# Altium PCB HRT_23D_EBS_Non1.1.PcbDoc
Units mil, origin at the board's own origin, x right, y up, seen from the top; angles counter-clockwise.
Board outline 1417.32 x 1338.58 mil, 2 copper layers (Top Layer, Bottom Layer); 17 components, 22 nets, 94 pads, 107 vias.
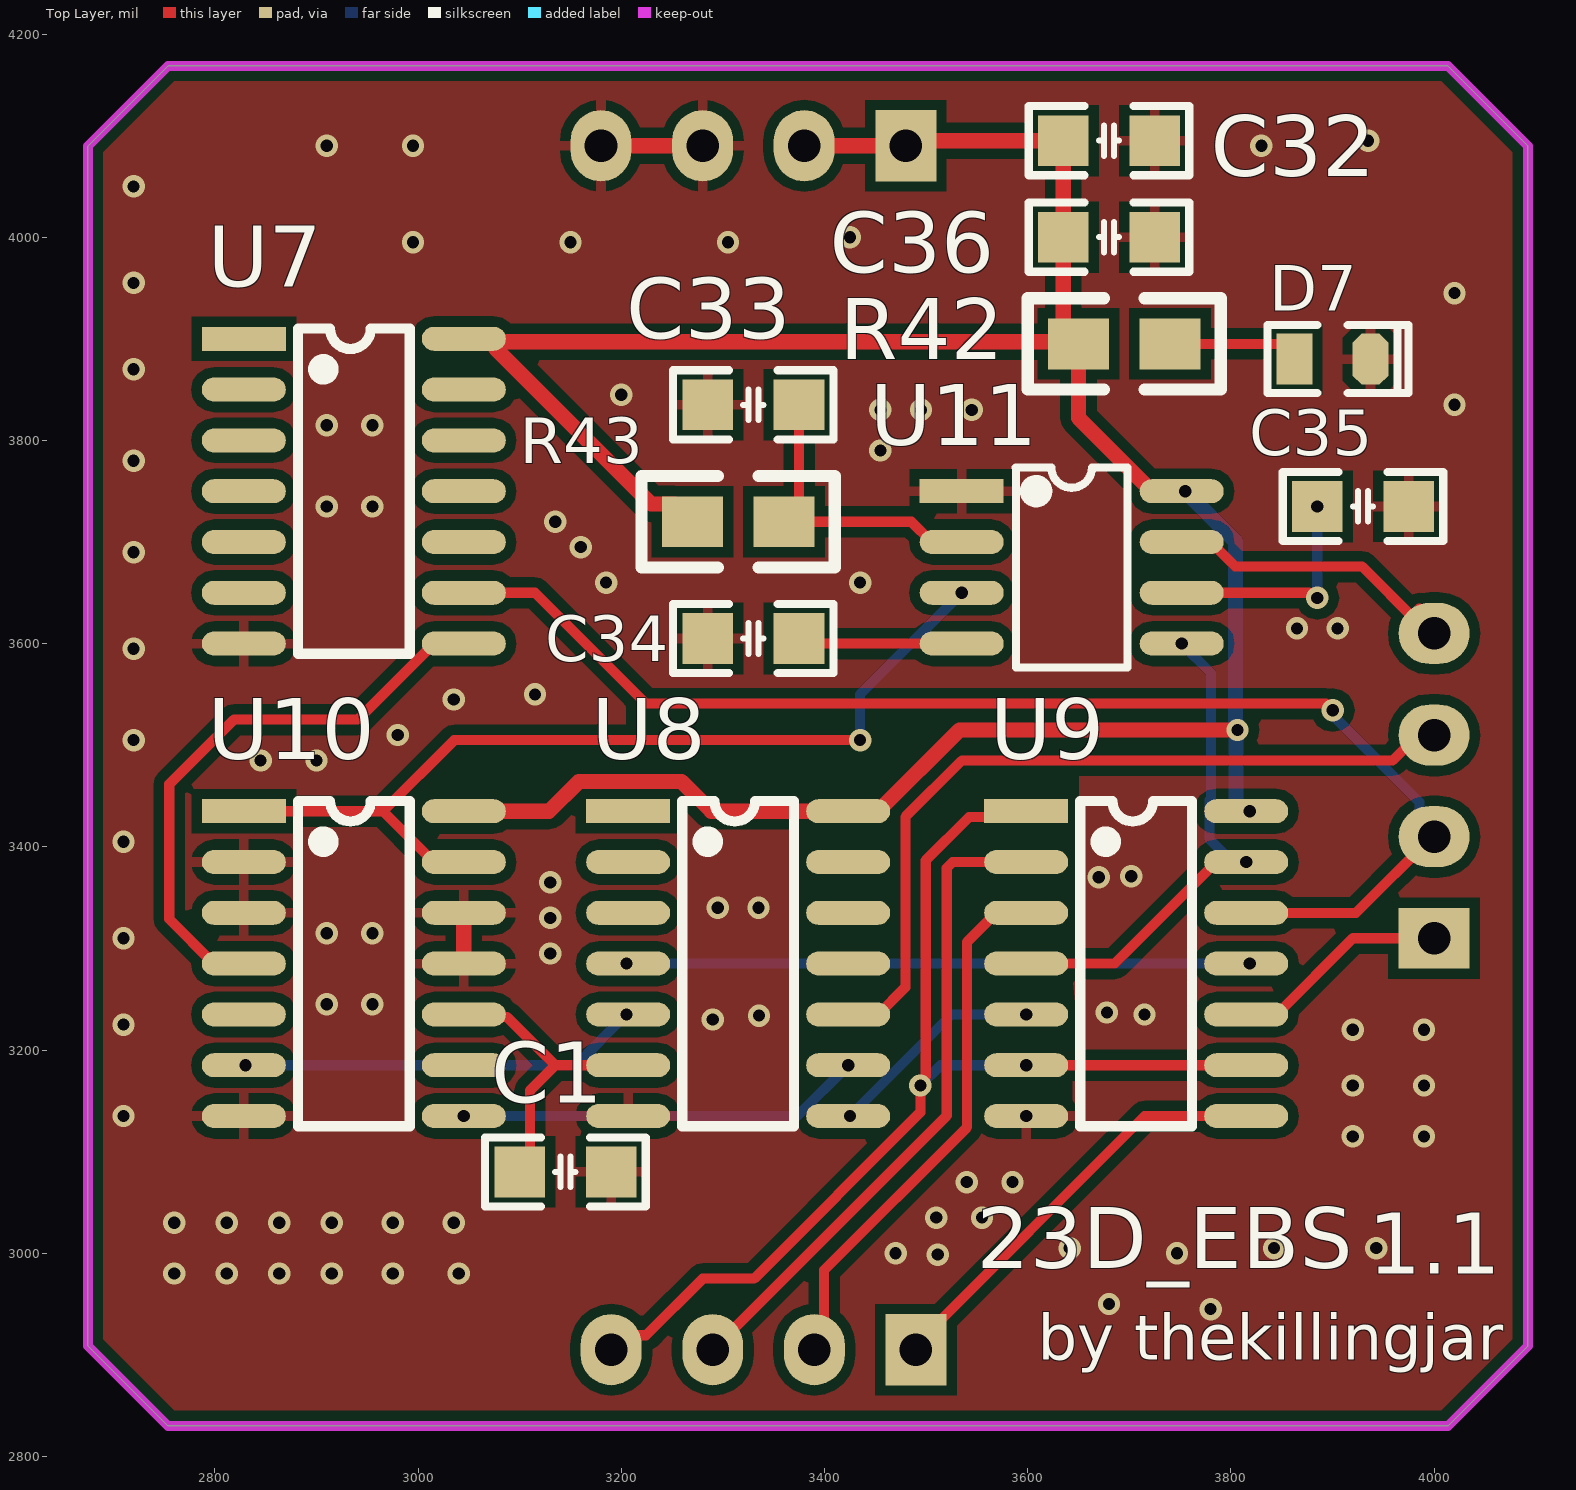
[diagram p0: Top Layer view]
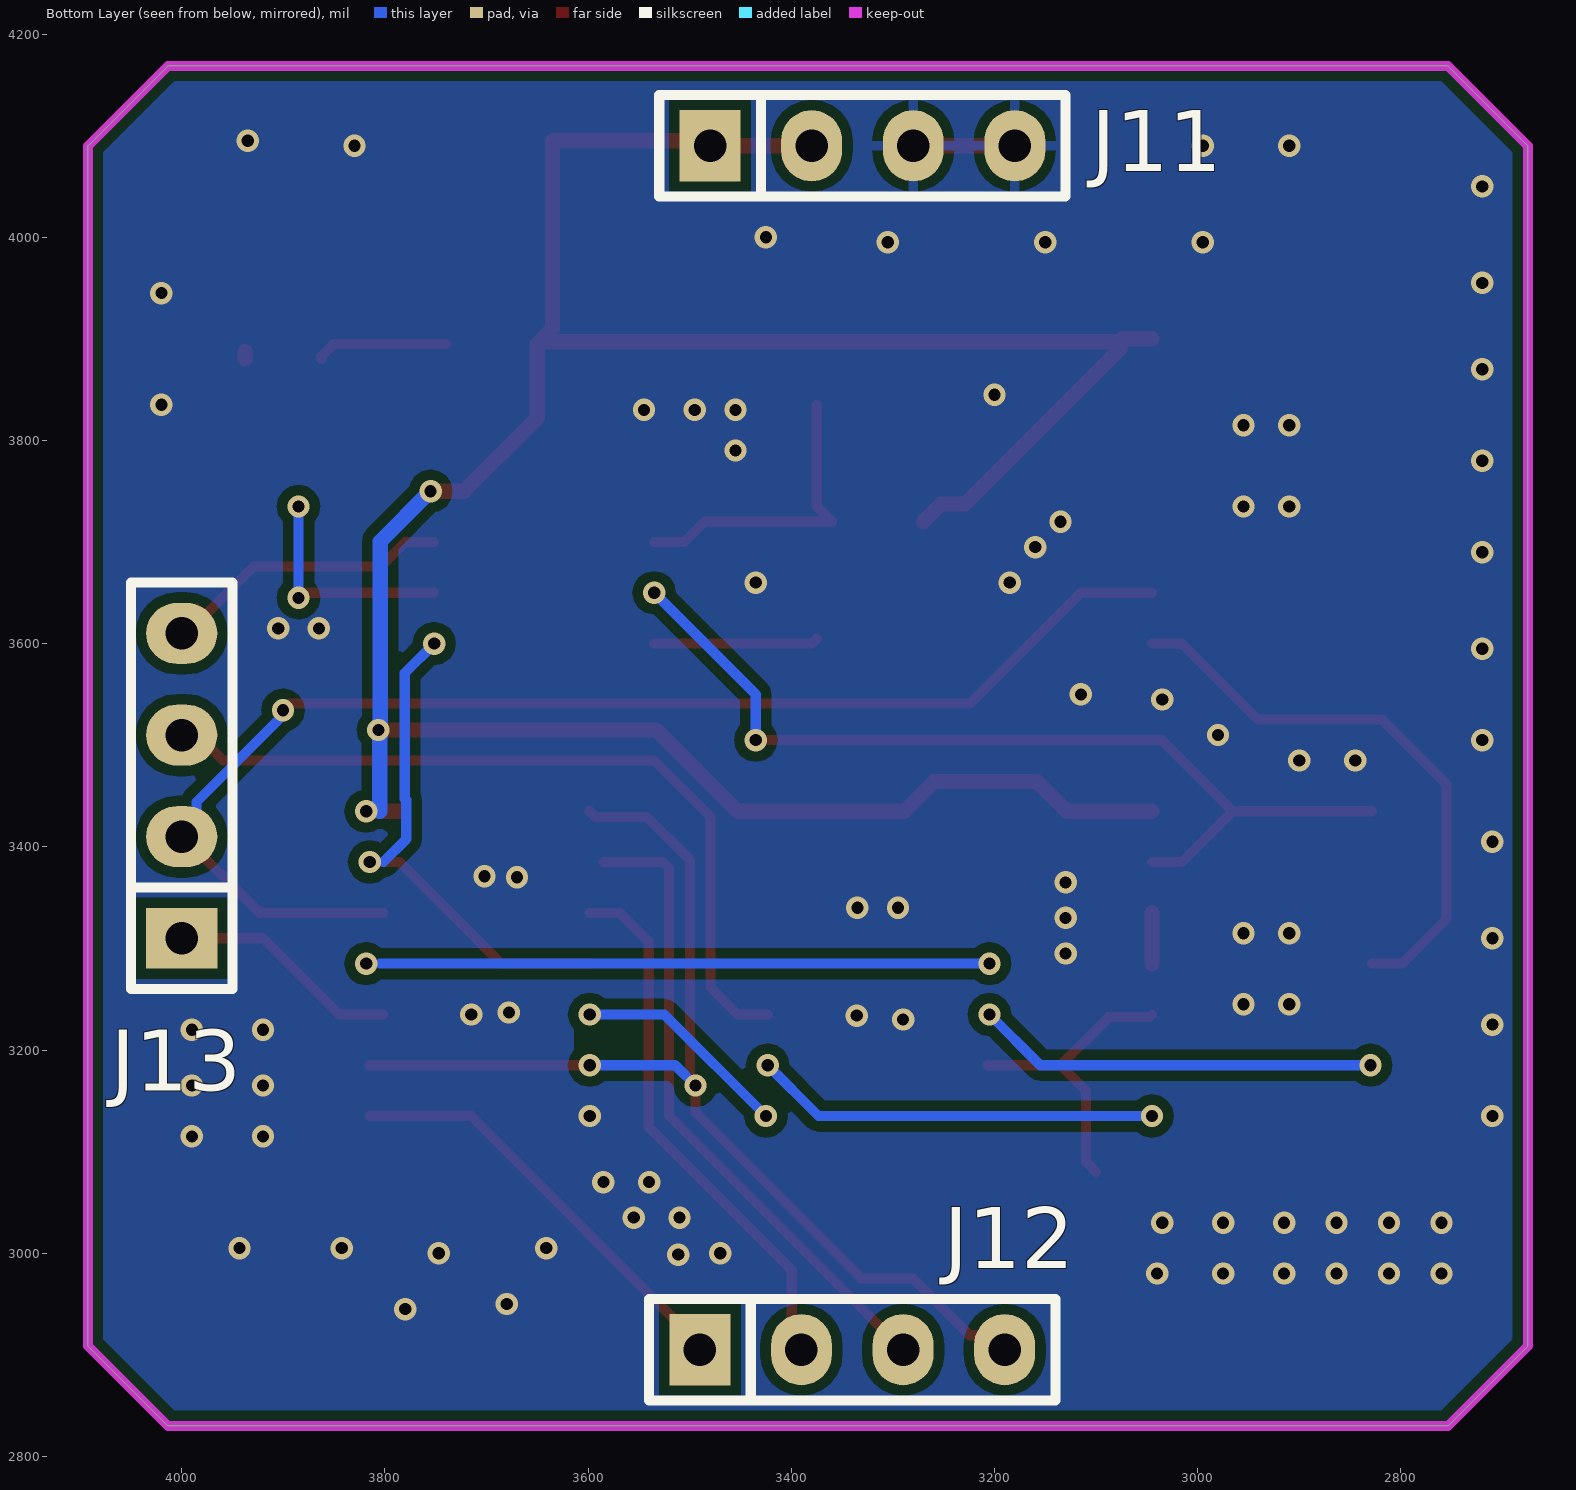
[diagram p1: Bottom Layer view, seen from below]
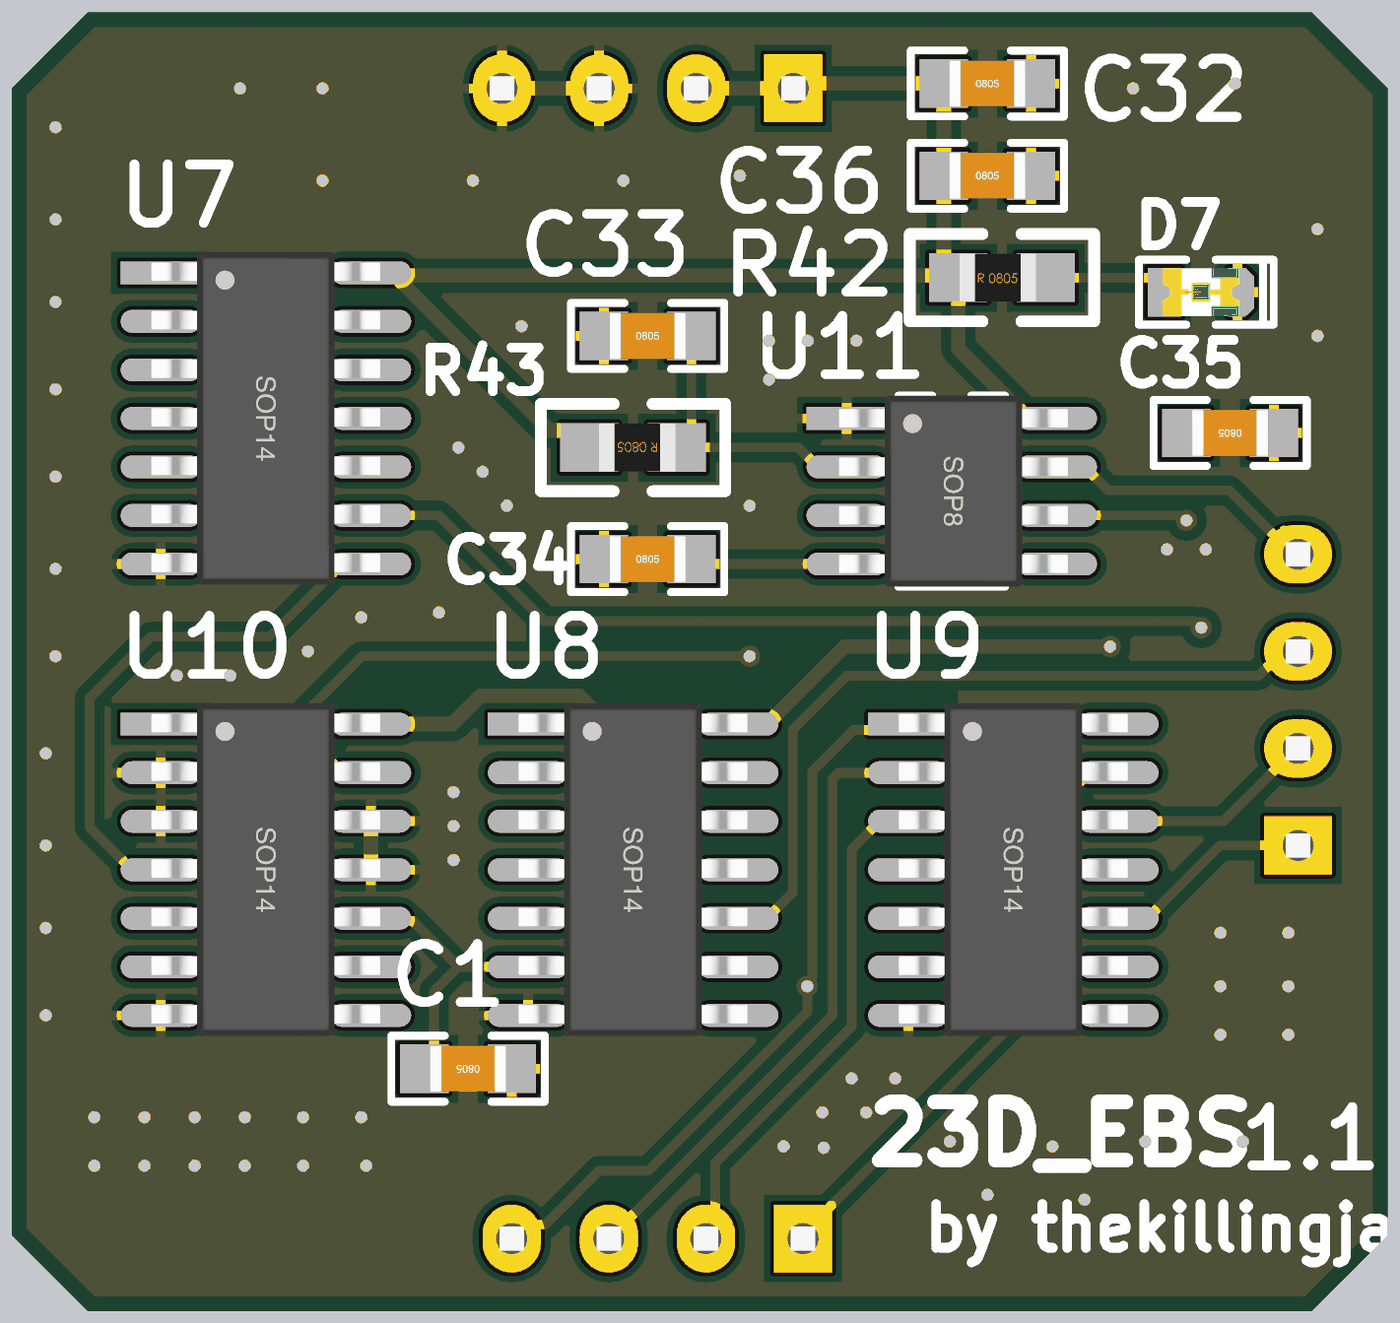
[diagram p2: 3D render of the assembled board from above, using the file's embedded part models]
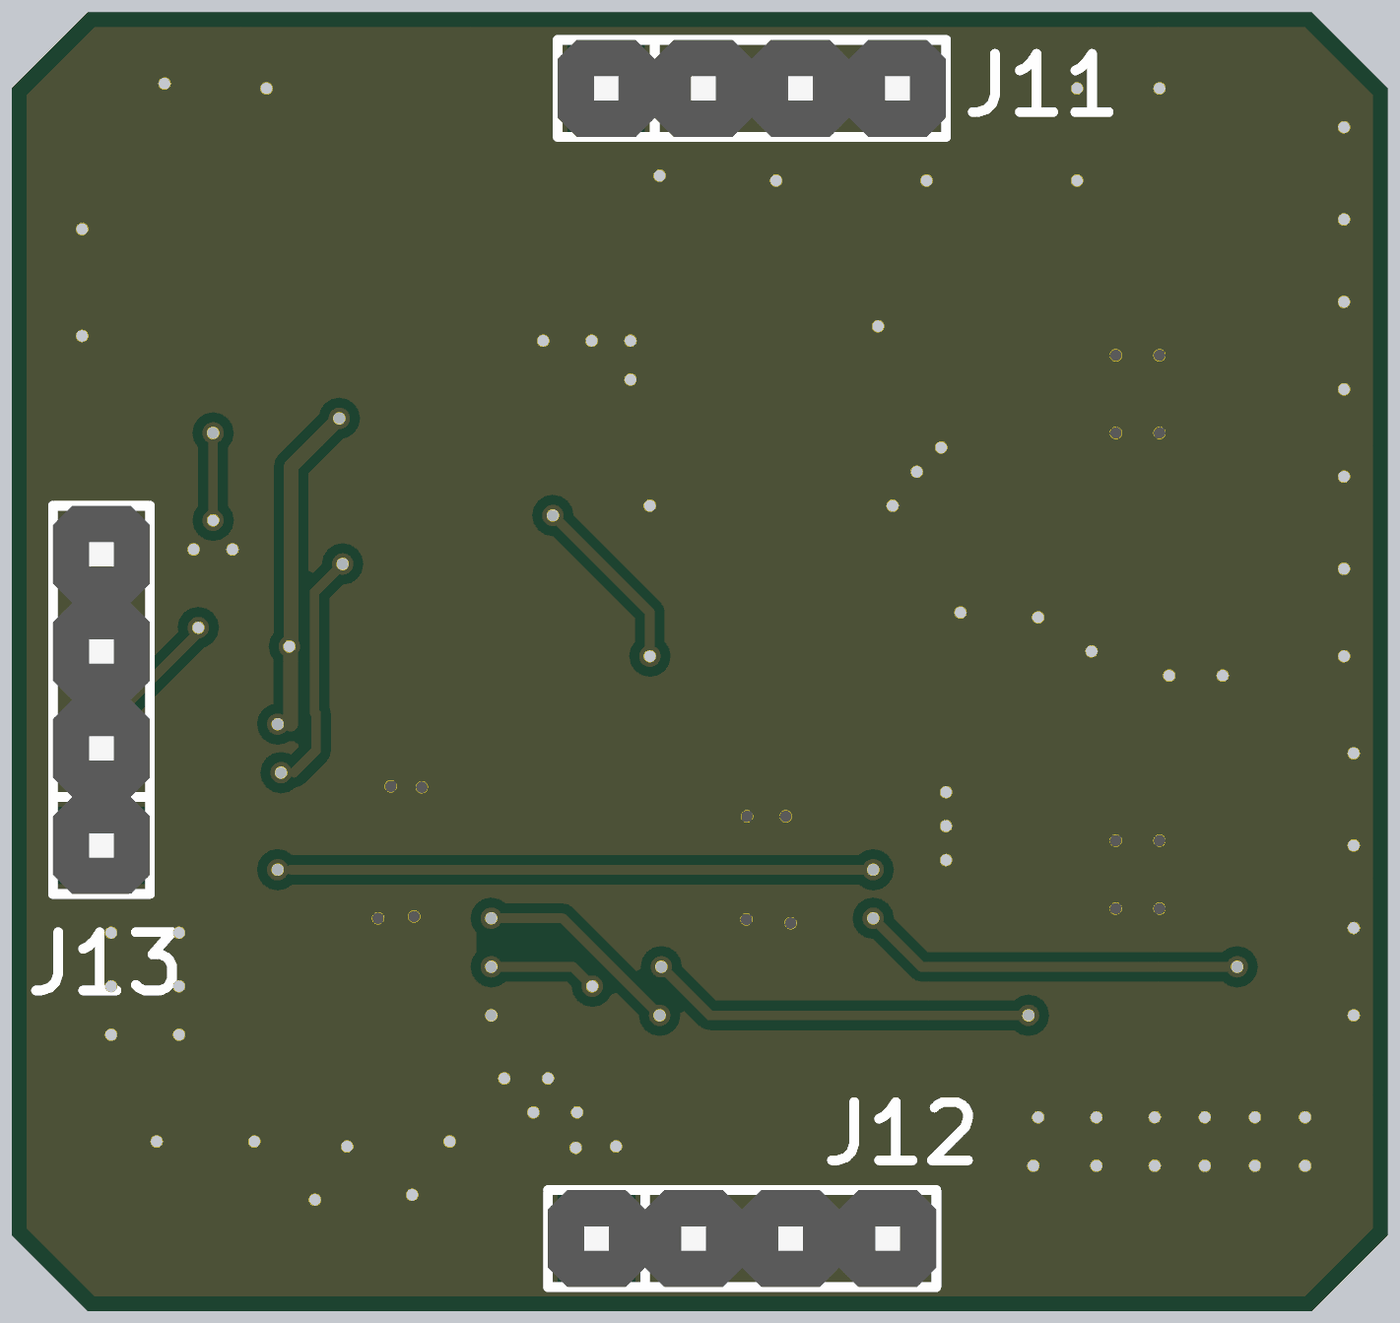
[diagram p3: 3D render of the assembled board from below, using the file's embedded part models]

## Layer stack, top to bottom
Top Solder: solder mask 0.4, Solder Resist, Dk 3.5
Top Layer: signal copper 1.4
Dielectric 1: dielectric 12.6, FR-4, Dk 4.8
Bottom Layer: signal copper 1.4
Bottom Solder: solder mask 0.4, Solder Resist, Dk 3.5

## Board outline
2675,2908.74 2675,4089.84 2753.74,4168.58 4013.58,4168.58 4092.32,4089.84 4092.32,2908.74 4013.58,2830 2753.74,2830

## Design rules (kind name [scope] priority, off if disabled: settings)
Clearance Clearance_1 [All] p1: gap=10 ignorepadtopadclearanceinfootprint=FALSE except(0: Arc-Hole Track-Hole SMDPad-Hole THPad-Hole Via-Hole Fill-Hole Poly-Hole Region-Hole Text-Hole)
Clearance [All] p2: gap=7 ignorepadtopadclearanceinfootprint=FALSE
PlaneClearance [All] p1: clearance=8
PlaneConnect [All] p1: planeconnectstyle=Direct reliefexpansion=20 reliefentries=4 reliefconductorwidth=10 reliefairgap=10
PolygonConnect [All] p1: thpad.connectstyle=Relief thpad.reliefconductorwidth=10 thpad.reliefentries=4 thpad.polygonreliefangle="90 Angle" thpad.airgapwidth=10 smdpad.connectstyle=Relief smdpad.reliefconductorwidth=10 smdpad.reliefentries=4 smdpad.polygonreliefangle="90 Angle" smdpad.airgapwidth=10 via.connectstyle=Direct via.reliefconductorwidth=10 via.reliefentries=4 via.polygonreliefangle="90 Angle" via.airgapwidth=10
RoutingVias [All] p1: holewidth=12 width=22 viastyle="Through Hole" minholewidth=12 minwidth=22 maxholewidth=12 maxwidth=22
SilkToSilkClearance [All] p1: silktosilkclearance=0
SilkToSolderMaskClearance [IsPad] p1: minsilkscreentomaskgap=0 clearancetoexposedcopper=TRUE
SolderMaskExpansion [All] p1: expansion=4 istentingtop=FALSE
Width VCC [InNet('VCC_5V')] p1: maxlimit=40 minlimit=15 preferedwidth=15 minimp=50.000000 maximp=50.000000 favimp=50.000000
Width GND [InNet('GND')] p2: maxlimit=40 minlimit=15 preferedwidth=15 minimp=50.000000 maximp=50.000000 favimp=50.000000
Width [All] p3: maxlimit=10 minlimit=7 preferedwidth=7 minimp=50.000000 maximp=50.000000 favimp=50.000000
26 further rules are at their usual default settings.

## Components (designator, comment, footprint, x,y, rotation, side; value= is the part's Value field where it differs from the comment)
C1 "0.01uF" "C 0805_M" 3145,3080 r180 top
C32 "0.1uF" "C 0805_M" 3680,4095 r0 top
C33 "47pF" "C 0805_M" 3330,3835 r0 top
C34 "1nF" "C 0805_M" 3330,3605 r0 top
C35 "10nF" "C 0805_M" 3930,3735 r180 top
C36 "1uF" "C 0805_M" 3680,4000 r0 top
D7 "红色" "LED 0805G" 3900,3880 r0 top
J11 "Pin HDR1X4" "PIN HDR1X4/2.54MM-S" 3480,4090 r90 bottom
J12 "Pin HDR1X4" "PIN HDR1X4/2.54MM-S" 3490,2905 r90 bottom
J13 "Pin HDR1X4" "PIN HDR1X4/2.54MM-S" 4000,3310 r0 bottom
R42 "3.3K" 0805R 3650,3895 r0 top
R43 "1M" 0805R 3360,3720 r180 top
U7 "CD4069" SOP14 2828.46,3900 r0 top
U8 "74HC32D" SOP14 3206.73,3435 r0 top
U9 "74HC08N" SOP14 3598.46,3435 r0 top
U10 "74HC74D" SOP14 2828.46,3435 r0 top
U11 "UCC2946D" SOP8 3535,3750 r0 top

## Footprints (in the part's own frame and the unit in brackets; to place one, negate y for a bottom-side part, rotate by r counter-clockwise, add the part's x,y. Pads: shape width x height; smd on the part's side, far side on the other; paste and mask are expansions set on the pad)
0805R [mil]
  rect 60x50 smd: 1(0,0) 2(90,0)
  silkscreen extent -50,-45 140,45, body extent 1,-25 80,25, height 15
"C 0805_M" [mil] "无极性贴片电容"
  rect 50x50 smd: 1(-45.01,-0.01) 2(45,0)
  silkscreen extent -79,-34 79,34, body extent -39,-24 39,24, height 20
"LED 0805G" [mil] "绿色0805LED"
  rect 35x50 smd: 1(-37.4,0)
  oct 35x50 smd: 2(37.4,0)
  silkscreen extent -64,-33 75,33, body extent -39,-25 39,25, height 32
"PIN HDR1X4/2.54MM-S" [mil]
  rect 70x60 hole 32: 1(0,0)
  oval 70x60 hole 32: 2(0,-100) 3(0,-200) 4(0,-300)
  silkscreen extent -50,-350 50,50, body extent -50,-350 50,50, height 336
SOP8 [mm]
  rect 2.1x0.6 smd: 1(0,0)
  oval 2.1x0.6 smd: 2(0,-1.27) 3(0,-2.54) 4(0,-3.81) 5(5.5,-3.81) 6(5.5,-2.54) 7(5.5,-1.27) 8(5.5,0)
  silkscreen extent 1.35,-4.41 4.15,0.6, body extent -0.21,-4.4 5.8,0.6, height 1.9
SOP14 [mm]
  rect 2.1x0.6 smd: 1(0,0)
  oval 2.1x0.6 smd: 2(0,-1.27) 3(0,-2.54) 4(0,-3.81) 5(0,-5.08) 6(0,-6.35) 7(0,-7.62) 8(5.5,-7.62) 9(5.5,-6.35) 10(5.5,-5.08) 11(5.5,-3.81) 12(5.5,-2.54) 13(5.5,-1.27) 14(5.5,0)
  silkscreen extent 1.35,-7.87 4.15,0.25, body extent -0.25,-8.16 5.75,0.54, height 1.9

## Part data
C1 C32 C33 C34 C35 C36: library part C, "无极性贴片电容"
D7: library part LED-SMD, "贴片LED", BOM名称=贴片LED, 学习资源=www.ooocke.com, 版权归属=源创客
R42 R43: library part RES, "贴片电阻"
U7: "反相器"
U8: "2输入或门"
U9: "2输入与门"
U10: "D触发器"
U11: "复位监控芯片"

## Via types
v1: diameter 22, hole 12, Top Layer to Bottom Layer, tented both sides, 107 vias

## Nets (pads, with @x,y where several pads share a name; then routed paths per layer and width w, separated by ;. In a path a pad name is that pad's centre, name@x,y a point inside that pad or via, vN(x,y) a via of type N, cw(c..) or ccw(c..) an arc to the next point about the centre after c; other vN are vias at no path point)
1S\D\: U7.8 U10.4 | length 571.6
  Top Layer w10: U10.4 2798.94,3285 2755.06,3328.88 2755.06,3461.6 2818.67,3525.21 2940.68,3525.21 3015.47,3600 U7.8
2S\D\: C1.2 U8.6 U10.10 | length 301.9
  Top Layer w10: U10.10 3047.61,3232.39 3087.61,3232.39 3135,3185 ; C1.2 3110,3090 3110,3160 3135,3185 ; U8.6 3177.2,3185 3135,3185
A\S\_\m\o\d\e\: J13.3 U8.10 | length 788.8
  Top Layer w10: U8.10 3452.8,3235 3479.61,3261.81 3479.61,3396.11 3479.61,3429.43 3535.17,3485 3959.14,3485 3984.14,3510 J13.3
AND_2B: U8.8 U9.5 | length 214.9
  Bottom Layer w10: v1(3425,3135) 3525,3235 v1(3598.46,3235)
b\r\a\k\e\1\: J13.1 U9.10 | length 229.5
  Top Layer w10: U9.10@3801.54,3235 3845,3235 3920,3310 J13.1
b\r\a\k\e\2\: J12.3 U9.2 | length 636.6
  Top Layer w10: J12.3 3520.37,3135.37 3520.37,3379.14 3526.22,3385 U9.2@3585,3385
brake_control1: J12.1 U9.8 | length 423.2
  Top Layer w10: J12.1 3490,2910 3715,3135 U9.8
brake_control2: J12.2 U9.3 | length 533.6
  Top Layer w10: J12.2 3399.57,2914.57 3399.57,2983.28 3540.37,3124.08 3540.37,3306.43 3568.94,3335 U9.3
GND: C1.1 C32.2 C33.1 C34.1 C35.1 C36.2 D7.2 J11.3 J11.4 U7.7 U8.7 U9.7 U10.2 U10.3 U10.7 U10.11 U10.12 U11.1 | length 157.5
  Top Layer w15: U10.11 U10.12 ; J11.4 J11.3 ; D7.2 D7.2@3937.4,3887.5
  other v1: 3780,2945 3680,2950 2760,2980 2811.67,2980 2863.33,2980 2915,2980 2975,2980 3040,2980 3511.36,2998.57 3470,3000 3747,2999.88 3641.25,3005 3842.5,3005 3943.12,3005 2760,3030 2811.67,3030 2863.33,3030 2915,3030 2975,3030 3035,3030 3510,3035 3555,3035 3540,3070 3585,3070 3920,3115 3990,3115 2710,3135 3598.46,3135 3920,3165 3990,3165 3920,3220 3990,3220 2710,3225 3290,3230 3335.56,3233.85 3715,3235 3677.95,3236.84 2910,3245 2955,3245 3130,3295 2710,3310 2910,3315 2955,3315 3130,3330 3295,3340 3335,3340 3130,3365 3670,3370 3701.93,3370.96 2710,3405 2845,3485 2900,3485 2720,3505 2980,3510 3035,3545 3115,3550 2720,3595 3865,3615 3905,3615 3185,3660 3435,3660 2720,3690 3160,3695 3135,3720 2910,3735 2955,3735 2720,3780 3455,3790 2910,3815 2955,3815 3455,3830 3495,3830 3545,3830 4020,3835 3200,3845 2720,3870 4020,3945 2720,3955 2995,3995 3150,3995 3305,3995 3425,4000 2720,4050 2910,4090 2995,4090 3830,4090 3935,4095
NetC33_2: C33.2 R43.1 U11.2 | length 304.5
  Top Layer w10: C33.2 3375,3735 R43.1 3485.47,3720 3505.47,3700 U11.2
NetC34_2: C34.2 U11.4 | length 162.1
  Top Layer w10: C34.2 3380,3600 U11.4
NetC35_2: C35.2 U11.6 | length 225.5
  Top Layer w10: U11.6 3876.75,3650 3881.75,3645 v1(3885,3645)
  Bottom Layer w10: v1(3885,3645) v1(3885,3735)
NetD7_1: D7.1 R42.2 | length 130.3
  Top Layer w10: R42.2 3850.1,3895 3862.6,3882.5 D7.1
OR_1A: U8.4 U9.11 | length 600
  Bottom Layer w10: v1(3205,3285) 3805,3285
  other v1: 3818.46,3285
OR_1B: U8.5 U10.6 | length 395.7
  Bottom Layer w10: v1(2830,3185) 3155,3185 v1(3205,3235)
OR_3A: U8.9 U10.8 | length 399
  Bottom Layer w10: v1(3045,3135) 3373.27,3135 v1(3423.27,3185)
R\E\S\: U10.1 U10.13 U11.3 | length 922.2
  Top Layer w10: U10.1 2965.47,3435 ; U10.13 3015.47,3385 2965.47,3435 ; v1(3435,3505) 3035.47,3505 2965.47,3435
  Bottom Layer w10: v1(3435,3505) 3435,3550 v1(3535,3650)
SDC_AS: J12.4 U9.1 U9.6 U9.9 | length 1099.1
  Top Layer w10: J12.4 3204.32,2919.32 3224.32,2919.32 3280,2975 3330.71,2975 3494.37,3138.66 v1(3494.37,3165) 3494.37,3168.25 3499.61,3173.49 3499.61,3386.67 3542.13,3429.19 3592.65,3429.19 U9.1 ; v1(3598.46,3185) U9.9
  Bottom Layer w10: v1(3494.37,3165) 3514.37,3185 v1(3598.46,3185)
shutdown_circuit: J13.2 U7.9 U9.12 | length 1298.4
  Top Layer w10: U7.9 3115,3650 3224,3541 3893.72,3541 v1(3900.27,3534.45) ; U9.12@3801.54,3335 3923.18,3335 3998.18,3410 J13.2
  Bottom Layer w10: v1(3900.27,3534.45) 3900.27,3529.39 3985.51,3444.15 3985.51,3424.49 J13.2
VCC_5V: C32.1 C36.1 J11.1 J11.2 R42.1 R43.2 U7.14 U8.14 U9.14 U10.14 U11.8 | length 2739.5
  Top Layer w15: U10.14 3128.83,3435 3158.14,3464.31 3259.3,3464.31 3288.61,3435 U8.14 3452.8,3435 3532.8,3515 v1(3806.43,3515) ; U7.14 3074.53,3900 U7.14@3080.69,3893.83 ; U7.14@3072.19,3900 3076.18,3896.02 3076.18,3890.5 3229.18,3737.5 3252.5,3737.5 R43.2 ; U7.14@3077.47,3897.06 3647.94,3897.06 R42.1 ; J11.2 J11.1 3484.99,4094.99 C32.1 C36.1 3634.99,3910.01 R42.1 ; U11.8 3722.01,3750 3650,3822.01 R42.1 ; U9.14@3785.47,3435 U9.14
  Bottom Layer w15: v1(3755,3750) 3804.62,3700.38 3804.62,3521.76 3805.09,3521.29 3805.09,3516.34 v1(3806.43,3515) ; 3805,3435 v1@3805,3515
  other v1: 3818.46,3435
W\D\O\: U9.4 U9.13 U11.5 | length 494.9
  Top Layer w10: U9.4 3685.47,3285 3785.47,3385 v1(3815,3385)
  Bottom Layer w10: v1(3751.54,3600) 3780.43,3571.11 3780.43,3447.2 3779,3445.77 3779,3407.54 3801.54,3385
watchdog: J13.4 U11.7 | length 316.3
  Top Layer w10: U11.7 3780,3700 3804.16,3675.84 3929.16,3675.84 3982.93,3622.07 3995,3610 J13.4 3985.43,3624.57 J13.4@3985.43,3634.57
pads on no net: U7.1 U7.2 U7.3 U7.4 U7.5 U7.6 U7.10 U7.11 U7.12 U7.13 U8.1 U8.2 U8.3 U8.11 U8.12 U8.13 U10.5 U10.9

## Polygon pours and split planes (outlines as drawn)
GND on Bottom Layer "GND_L02_P000" (solid, pour order 0): 2753.74,4168.58 2675,4089.84 2675,2908.74 2753.74,2830 4013.58,2830 4092.32,2908.74 4092.32,4089.84 4013.58,4168.58
GND on Top Layer "GND_L01_P001" (solid, pour order 1): 2753.74,4168.58 2675,4089.84 2675,2908.74 2753.74,2830 4013.58,2830 4092.32,2908.74 4092.32,4089.84 4013.58,4168.58

## Keep-outs
Keep-Out Layer:
  lines w10: 2675,2908.74 2753.74,2830 ; 2675,2908.74 2675,4089.84 ; 2675,2908.74 2675,4089.84 ; 2675,2908.74 2753.74,2830 ; 2675,4089.84 2753.74,4168.58 ; 2675,4089.84 2753.74,4168.58 ; 2753.74,2830 4013.58,2830 ; 2753.74,2830 4013.58,2830 ; 2753.74,4168.58 4013.58,4168.58 ; 2753.74,4168.58 4013.58,4168.58 ; 4013.58,2830 4092.32,2908.74 ; 4013.58,2830 4092.32,2908.74 ; 4013.58,4168.58 4092.32,4089.84 ; 4013.58,4168.58 4092.32,4089.84 ; 4092.32,2908.74 4092.32,4089.84 ; 4092.32,2908.74 4092.32,4089.84

## Other copper
Top Layer:
  pour cut-out: 3701.46,3691.49 3701.46,3658.51 3767.33,3658.51 3781.06,3672.24 3773.3,3680 3770,3680
  pour cut-out: 3560.66,3155.59 3560.66,3158.75 3556.81,3162.61
  pour cut-out: 3556.81,3162.61 3558.66,3164.45 3638.75,3164.45 3643.72,3169.42 3643.72,3150.72
  pour cut-out: 3644.01,3269.71 3644.01,3251.01 3643.72,3250.72 3637.05,3257.39 3556.81,3257.39 3556.81,3262.61 3563.91,3269.71 3644.01,3269.71 3644.01,3219.56 3638.85,3214.41 3560.66,3214.41 3560.66,3211.25 3556.81,3207.39 3558.61,3205.59 3638.71,3205.59 3644.01,3200.29 3655,3211.29 3655,3210 3650,3205
  pour cut-out: 3541.51,3469.71 3522.98,3451.18 3527.6,3446.56 3547.13,3446.56 3547.13,3456.81 3649.8,3456.81 3649.8,3413.19 3647.02,3415.97 3521.95,3415.97 3515.66,3409.68 3515.66,3401.74 3517.1,3400.29 3643.29,3400.29 3643.72,3400.72 3650.23,3394.21 3650.23,3378.18 3636.5,3364.45 3631.68,3369.28 3536.09,3369.28 3535.66,3369.71 3535.66,3329.89 3538.37,3329.89 3540.28,3327.97 3567.31,3355 3635.96,3355 3636.5,3355.55 3650.23,3341.82 3650.23,3335 3627.99,3312.76 3582.24,3312.76 3590,3305 3590.55,3305.55 3638.75,3305.55 3644.01,3300.29 3650,3306.29 3650,3470
  pour cut-out: 3370,3420 3372.84,3417.16 3455.59,3417.16 3462.48,3410.26 3458.45,3406.23 3385.92,3406.23 3373.19,3393.51 3373.19,3376.49 3386.92,3362.76 3456.85,3362.76 3457.86,3363.77 3461.89,3359.74 3461.36,3359.74 3457.17,3355.55 3385.23,3355.55 3373.19,3343.51 3378.02,3338.69 3378.02,3319.28 3387.23,3319.28 3393.74,3312.76 3394.75,3313.77 3458.45,3313.77 3462.48,3309.74 3458.98,3306.23 3383.52,3306.23 3373.19,3295.9 3373.19,3276.49 3386.92,3262.76 3446.84,3262.76 3446.84,3259.98 3449.58,3257.24 3447.88,3255.55 3382.84,3255.55 3373.19,3245.9 3373.19,3226.49 3386.92,3212.76 3446.84,3212.76 3446.84,3210.78 3449.85,3207.76 3447.64,3205.55 3385.23,3205.55 3373.19,3193.51 3378.02,3188.69 3378.02,3169.28 3456.48,3169.28 3461.31,3164.45 3466.13,3169.28 3468.52,3169.28 3468.52,3179.1 3500.45,3211.03 3500.45,3135.45 3470,3105 3462.24,3112.76 3452.8,3112.76 3452.8,3122.96 3473.34,3143.51 3459.61,3157.24 3386.92,3157.24 3378.02,3148.33 3378.02,3121.67 3370,3129.68
  pour cut-out: 3041.81,3489.71 3013.54,3461.44 3022.13,3452.84 3123.36,3452.84 3152.68,3482.15 3266.69,3482.15 3296,3452.84 3445.4,3452.84 3511.73,3519.17 3511.73,3525.71 3450.81,3525.71 3449.29,3524.19 3449.29,3512.12 3456.41,3505 3435,3483.59 3426.21,3483.59 3420.09,3489.71
  pour cut-out: 3205.08,3538.04 3205,3537.96 3205,3515 3414.53,3515 3420.32,3520.78 3413.56,3527.54 3413.56,3529.7 3217.88,3529.7 3209.83,3537.75 3205.66,3537.75
  pour cut-out: 3006.96,3879.45 2995.57,3859.64 3066.36,3871.77 3060.37,3877.76 3008.66,3877.76 2994.93,3891.49 2994.93,3858.51
Bottom Layer:
  pour cut-out: 3506.33,3219.71 3491.92,3205.29 3491.92,3202.14 3493.92,3200.14 3613.6,3200.14 3613.6,3219.86 3613.45,3219.71

## Silkscreen, mask and mechanical layers (free items; w line width, h text height)
Top Overlay:
  text "23D_EBS" at 3550,2985 h60
  text "1.1" at 3935,2980 h60
  text "by thekillingjar" at 3610,2895 h45
Mechanical 2:
  lines w10: 2675,2908.74 2675,4089.84 2753.74,4168.58 4013.58,4168.58 4092.32,4089.84 4092.32,2908.74 4013.58,2830 2753.74,2830 2675,2908.74 ; 3125,4040 3125,4145 3535,4145 3535,4040 3125,4040 ; 3135,2855 3135,2960 3545,2960 3545,2855 3135,2855 ; 3945,3660 3950,3255 4050,3255 4050,3660 3945,3660